# Altium PCB Space_OUT.PcbDoc (part 3 of 3)
Units mm, origin at the board's own origin, x right, y up, seen from the top; angles counter-clockwise.
Board outline 300 x 100 mm, 4 copper layers (Top Layer, MidLayer1, MidLayer2, Bottom Layer); 157 components, 49 nets, 745 pads, 302 vias.
Unrouted connection lines stored in the file: 3.
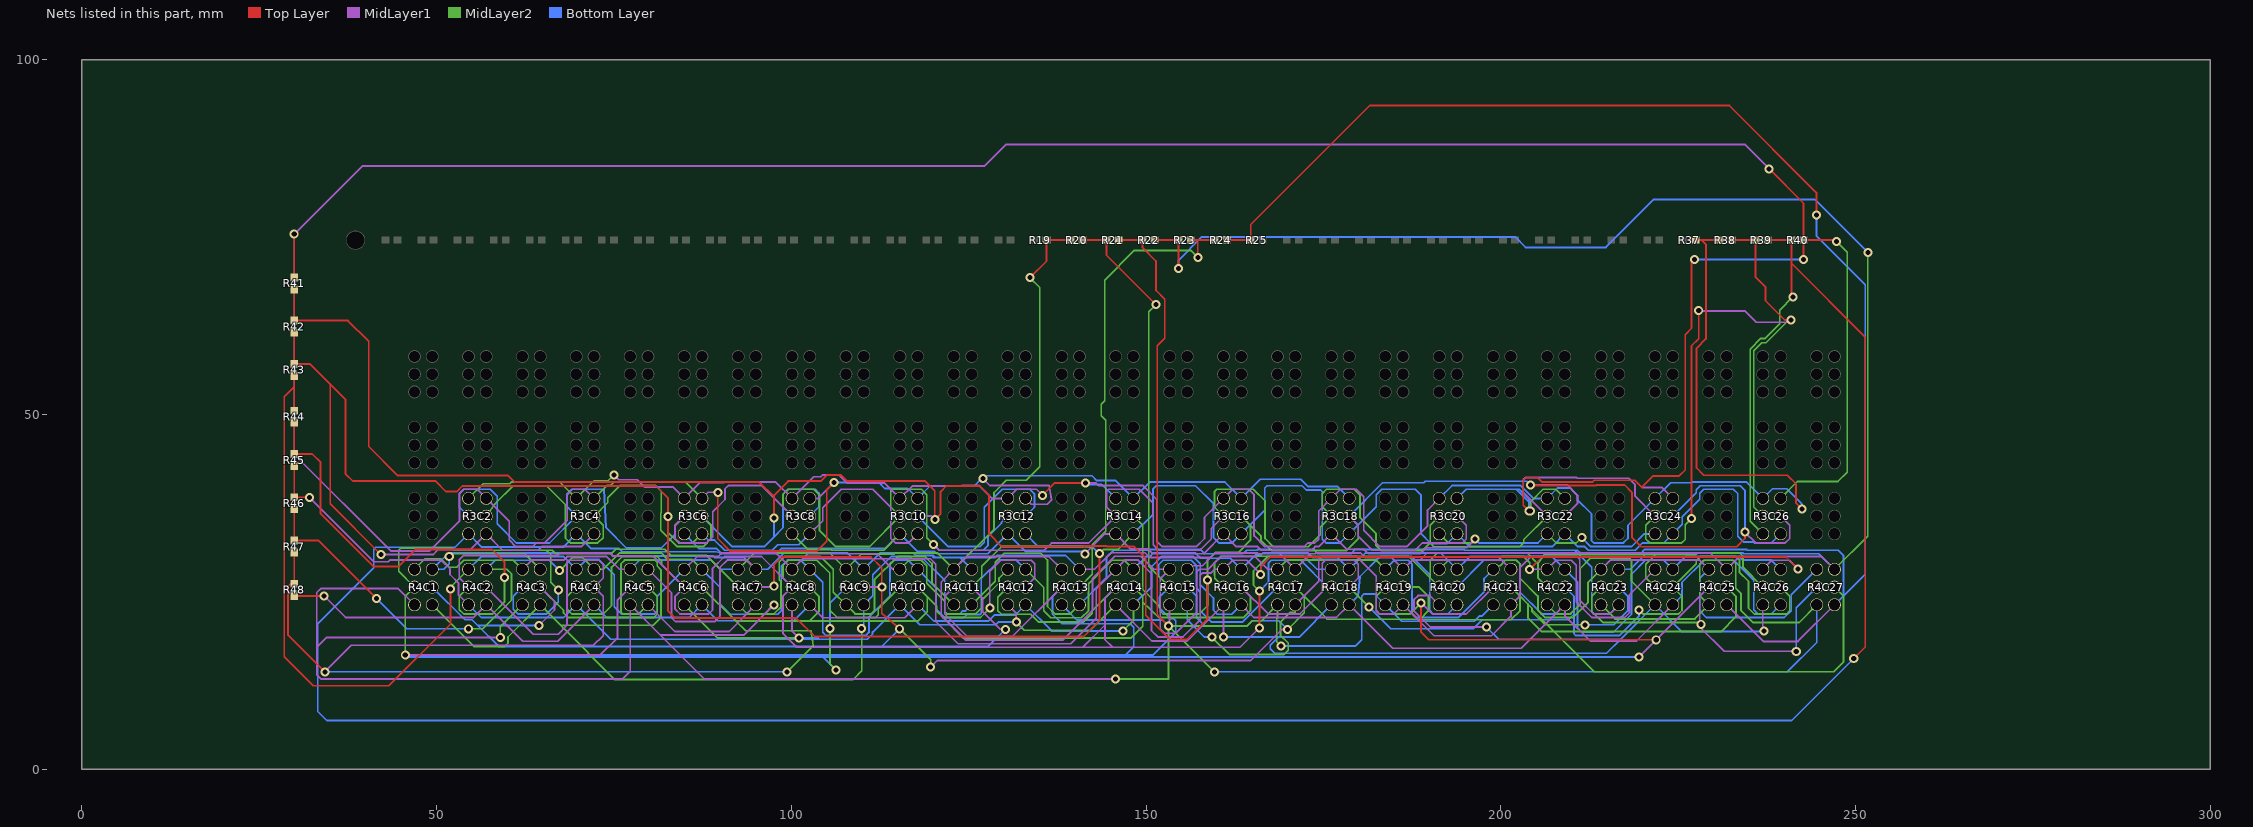
[diagram p5: the nets of this part, all layers, seen from the top]

## Via types
v1: diameter 1.27, hole 0.711, Top Layer to Bottom Layer, 302 vias

## Nets (pads, with @x,y where several pads share a name; then routed paths per layer and width w, separated by ;. In a path a pad name is that pad's centre, name@x,y a point inside that pad or via, vN(x,y) a via of type N, cw(c..) or ccw(c..) an arc to the next point about the centre after c; other vN are vias at no path point) (continued)
NetR3C2_1: R3C2.1 R3C4.1 R3C6.1 R3C8.1 R3C10.1 R3C12.1 R3C14.1 R3C16.1 R3C18.1 R3C20.1 R3C22.1 R3C24.1 R3C26.1 R37.1 R38.2 | length 311.9
  Top Layer w0.254: v1(135.42,38.595) 137.16,40.335 v1(141.503,40.335) ; R38.2@230.798,74.549 228.321,74.549 ; v1(242.418,36.678) 241.605,37.49 241.605,40.183 240.36,41.427 228.6,41.427 227.584,42.443 227.584,59.309 228.905,60.63 228.905,73.965 228.321,74.549 ; 228.321,74.549 R37.1@227.418,74.549 228.321,74.549
  MidLayer1 w0.254: v1(75.032,41.478) 75.729,40.781 78.308,40.781 79.312,39.776 83.309,39.776 R3C6.1@84.924,38.161 87.119,40.356 90.508,40.356 90.615,40.462 97.823,40.462 R3C8.1@100.124,38.161 103.171,41.208 104.184,41.208 104.413,41.438 106.755,41.438 107.879,40.313 113.172,40.313 R3C10.1@115.324,38.161 117.054,39.891 123.984,39.891 124.047,39.954 126.492,39.954 128.285,38.161 R3C12.1@130.524,38.161 131.809,39.446 134.569,39.446 v1(135.42,38.595) ; v1(141.503,40.335) 142.923,40.335 143.303,39.955 149.588,39.955 151.535,38.007 151.535,32.122 152.285,31.372 157.105,31.372 158.242,32.509 158.242,35.479 R3C16.1@160.924,38.161 162.209,39.446 164.475,39.446 165.238,38.683 165.238,32.869 166.735,31.372 172.308,31.372 172.813,31.877 173.793,31.877 174.346,32.429 174.346,36.383 R3C18.1@176.124,38.161 177.409,39.446 179.656,39.446 180.685,38.417 180.685,33.64 182.953,31.372 186.77,31.372 189.687,34.289 189.687,36.524 R3C20.1@191.324,38.161
  MidLayer2 w0.254: R3C2.1@54.524,38.161 56.588,40.225 60.326,40.225 60.559,40.458 67.427,40.458 R3C4.1@69.724,38.161 72.174,40.611 74.164,40.611 v1(75.032,41.478)
  Bottom Layer w0.254: v1(141.503,40.335) 141.72,40.118 143.767,40.118 R3C14.1@145.724,38.161 ; R3C20.1@191.324,38.161 193.117,39.954 202.794,39.954 204.587,38.161 R3C22.1@206.524,38.161 207.987,39.624 209.779,39.624 210.795,38.608 210.795,37.973 212.776,35.992 212.776,32.21 213.106,31.88 217.273,31.88 217.905,32.512 217.905,34.342 R3C24.1@221.724,38.161 223.919,40.356 226.927,40.356 227.029,40.458 234.627,40.458 R3C26.1@236.924,38.161 238.285,39.522 240.284,39.522 242.418,37.389 v1(242.418,36.678)
NetR3C2_2: R3C2.2 R3C4.2 R3C6.2 R3C8.2 R3C10.2 R3C12.2 R3C14.2 R3C16.2 R3C18.2 R3C20.2 R3C22.2 R3C24.2 R3C26.2 R38.1 R39.2 | length 417
  Top Layer w0.254: v1(226.873,35.331) 226.873,59.665 227.889,60.681 v1(227.889,64.618) ; R38.1@232.498,74.549 R39.2@235.878,74.549 235.878,69.379 237.287,67.97 237.287,66.04 240.03,63.297 v1(240.919,63.297)
  MidLayer1 w0.254: R3C6.2@84.924,35.661 83.642,34.379 83.642,32.512 84.274,31.88 88.065,31.88 88.951,32.766 88.951,36.271 90.678,37.998 90.678,39.51 91.123,39.954 95.831,39.954 R3C8.2@100.124,35.661 ; v1(120.04,31.674) 120.853,30.861 135.687,30.861 136.703,31.877 141.94,31.877 R3C14.2@145.724,35.661 144.424,36.961 144.424,39.141 144.73,39.447 149.057,39.447 151.027,37.477 151.027,31.614 151.777,30.864 157.613,30.864 159.182,32.433 159.182,33.919 R3C16.2@160.924,35.661 ; R3C22.2@206.524,35.661 203.175,39.01 203.175,40.839 203.444,41.108 210.653,41.108 210.765,40.996 218.008,40.996 218.921,40.083 218.921,38.464 R3C24.2@221.724,35.661 ; v1(227.889,64.618) 227.959,64.548 234.417,64.548 235.998,62.967 240.589,62.967 v1(240.919,63.297)
  MidLayer2 w0.254: R3C8.2@100.124,35.661 98.831,36.954 98.831,38.71 99.568,39.446 103.171,39.446 104.009,38.608 104.009,33.623 106.26,31.372 111.035,31.372 R3C10.2@115.324,35.661 114.043,36.942 114.043,39.185 114.3,39.442 118.364,39.442 119.105,38.701 119.105,32.609 v1(120.04,31.674) ; R3C16.2@160.924,35.661 159.639,36.946 159.639,39.116 159.969,39.446 165.126,39.446 166.776,37.796 166.776,32.512 167.945,31.344 172.869,31.344 174.549,33.024 174.549,34.086 R3C18.2@176.124,35.661 174.828,36.957 174.828,38.837 175.434,39.442 179.324,39.442 180.162,38.604 180.162,35.433 182.423,33.172 182.423,31.496 183.083,30.836 188.976,30.836 190.043,31.902 ; R3C20.2@191.324,35.661 190.043,34.38 ; R3C22.2@206.524,35.661 203.231,32.368 203.231,31.893 202.692,31.354 190.566,31.354 190.043,31.877 190.043,31.902 ; R3C24.2@221.724,35.661 220.421,34.358 220.421,32.439 220.98,31.88 225.501,31.88 225.984,32.363 225.984,34.442 v1(226.873,35.331) ; R3C26.2@236.924,35.661 235.643,36.942 235.643,58.968 236.775,60.1 237.364,60.1 240.561,63.297 v1(240.919,63.297) ; 190.043,31.902 190.043,34.38 ; 190.043,31.902 190.043,34.38
  Bottom Layer w0.254: R3C2.2@54.524,35.661 53.238,36.947 53.238,38.837 53.848,39.446 57.582,39.446 58.572,38.456 58.572,34.582 61.277,31.877 65.94,31.877 R3C4.2@69.724,35.661 68.428,36.957 68.428,38.786 69.088,39.446 73.635,39.446 73.914,34.011 76.759,31.166 81.686,31.166 83.642,33.122 83.642,34.379 R3C6.2@84.924,35.661 ; v1(120.04,31.674) 120.85,30.864 127.089,30.864 127.721,31.496 127.721,32.75 129.642,34.671 129.642,34.779 R3C12.2@130.524,35.661
NetR3C2_3: R3C2.3 R3C4.3 R3C6.3 R3C8.3 R3C10.3 R3C12.3 R3C14.3 R3C16.3 R3C18.3 R3C20.3 R3C22.3 R3C24.3 R3C26.3 R39.1 R40.2 | length 587.5
  Top Layer w0.254: R39.1@237.578,74.549 R40.2@240.958,74.549 ; v1(241.148,66.548) 240.958,66.738 240.958,71.284 ; v1(249.733,15.596) 251.358,17.221 251.358,60.884 240.958,71.284 ; 240.958,71.284 R40.2@240.958,74.549 ; 240.958,71.284 R40.2@240.958,74.549
  MidLayer1 w0.254: v1(141.402,30.353) 144.21,33.161 R3C14.3@145.724,33.161 147.872,31.013 150.292,31.013 150.949,30.356 158.119,30.356 R3C16.3@160.924,33.161 162.716,31.369 165.722,31.369 166.227,30.864 173.321,30.864 173.826,31.369 174.332,31.369 R3C18.3@176.124,33.161 178.282,31.003 180.712,31.003 181.359,30.356 188.66,30.356 189.519,31.215 195.197,31.215 v1(196.393,32.41)
  MidLayer2 w0.254: R3C8.3@100.124,33.161 102.319,30.966 105.636,30.966 105.738,30.864 113.027,30.864 R3C10.3@115.324,33.161 ; R3C20.3@191.324,33.161 192.605,31.88 195.862,31.88 v1(196.393,32.41) ; R3C22.3@206.524,33.161 207.808,31.877 210.642,31.877 v1(211.407,32.642) ; R3C26.3@236.924,33.161 235.135,34.95 235.135,59.191 236.65,60.706 237.236,60.706 239.293,62.763 239.293,64.694 v1(241.148,66.548)
  Bottom Layer w0.254: R3C6.3@84.924,33.161 87.008,31.077 89.506,31.077 90.227,30.356 ; v1(141.402,30.353) 141.097,30.658 133.027,30.658 R3C12.3@130.524,33.161 127.719,30.356 120.545,30.356 120.243,30.658 117.827,30.658 R3C10.3@115.324,33.161 113.278,31.115 98.648,31.115 97.889,30.356 90.227,30.356 ; v1(196.393,32.41) 196.923,31.88 205.243,31.88 R3C22.3@206.524,33.161 ; v1(211.407,32.642) 212.677,31.372 218.413,31.372 220.202,33.161 R3C24.3@221.724,33.161 ; v1(249.733,15.596) 240.995,6.858 34.544,6.858 33.274,8.128 33.274,20.498 41.173,28.397 41.173,30.988 41.453,31.267 52.63,31.267 R3C2.3@54.524,33.161 56.392,31.293 67.856,31.293 R3C4.3@69.724,33.161 71.77,31.115 75.71,31.115 76.189,30.636 89.439,30.636 90.227,30.356
NetR3C2_4: R3C2.4 R3C4.4 R3C6.4 R3C8.4 R3C10.4 R3C12.4 R3C14.4 R3C16.4 R3C18.4 R3C20.4 R3C22.4 R3C24.4 R3C26.4 R40.1 R41.2 | length 650
  Top Layer w0.254: R41.2@29.972,69.303 v1(29.972,75.387) ; v1(89.662,39.014) 89.662,32.512 91.44,30.734 103.632,30.734 105.004,32.106 105.004,39.37 v1(106.045,40.411) ; v1(203.962,36.398) 203.175,37.186 203.175,40.742 203.505,41.072 205.207,41.072 205.791,40.488 212.928,40.488 213.157,40.716 218.872,40.716 219.875,39.713 221.488,41.326 225.146,41.326 225.984,42.164 225.984,61.239 226.873,62.128 226.873,71.374 v1(227.305,71.806) ; v1(237.818,84.582) 242.658,79.742 R40.1@242.658,74.549 ; v1(242.658,71.806) R40.1@242.658,74.549 ; v1(247.294,74.371) 247.117,74.549 R40.1@242.658,74.549
  MidLayer1 w0.254: R3C4.4@72.224,38.161 70.939,39.446 69.19,39.446 68.443,38.7 68.443,35.05 65.273,31.88 64.095,31.88 63.587,31.372 61.197,31.372 60.267,32.302 60.267,34.918 R3C2.4@57.024,38.161 55.743,39.442 53.848,39.442 53.243,38.837 53.243,34.93 49.073,30.759 43.561,30.759 29.972,44.348 v1(29.972,75.387) 39.599,85.014 127.279,85.014 130.302,88.036 234.364,88.036 v1(237.818,84.582) ; R3C6.4@87.424,38.161 88.277,39.014 v1(89.662,39.014) ; R3C8.4@102.624,38.161 103.795,38.161 v1(106.045,40.411) ; v1(127,40.97) 128.016,39.954 136.373,39.954 136.703,37.95 136.091,37.338 133.847,37.338 R3C12.4@133.024,38.161 ; 222.736,39.649 222.672,39.713 219.875,39.713 219.939,39.649 222.736,39.649 ; 222.736,39.649 R3C24.4@224.224,38.161 222.736,39.649
  MidLayer2 w0.254: R3C4.4@72.224,38.161 74.017,39.954 74.524,39.954 75.032,40.462 85.123,40.462 R3C6.4@87.424,38.161 ; v1(204.191,36.398) 204.191,37.694 205.939,39.442 207.743,39.442 R3C22.4@209.024,38.161 ; R3C26.4@239.424,38.161 241.801,40.538 247.498,40.538 248.813,41.854 248.813,72.853 v1(247.294,74.371)
  Bottom Layer w0.254: v1(106.045,40.411) 112.319,40.411 113.182,39.548 116.437,39.548 R3C10.4@117.824,38.161 119.566,39.903 125.781,39.903 ; v1(127,40.97) v1@126.924,41.046 ; R3C18.4@178.624,38.161 176.937,39.848 172.813,39.848 171.818,40.843 166.106,40.843 R3C16.4@163.424,38.161 161.127,40.458 150.521,40.458 R3C14.4@148.224,38.161 145.72,40.665 143.073,40.665 142.387,41.351 127.229,41.351 v1@126.924,41.046 ; R3C20.4@193.824,38.161 195.109,39.446 ; v1(203.962,36.398) 203.962,37.668 ; v1(204.191,36.398) 204.191,37.44 203.962,37.668 ; v1(227.305,71.806) v1(242.658,71.806) ; 125.781,39.903 v1@126.924,41.046 ; 125.781,39.903 v1@126.924,41.046 ; 195.109,39.446 202.184,39.446 ; 195.109,39.446 202.184,39.446 ; 202.184,39.446 203.962,37.668 ; 202.184,39.446 202.583,39.446 203.962,38.067 203.962,37.668
NetR3C2_5: R3C2.5 R3C4.5 R3C6.5 R3C8.5 R3C10.5 R3C12.5 R3C14.5 R3C16.5 R3C18.5 R3C20.5 R3C22.5 R3C24.5 R3C26.5 R41.1 R42.2 | length 508.6
  Top Layer w0.254: R41.1@29.972,67.603 R42.2@29.972,63.207 37.529,63.207 40.462,60.274 40.462,45.466 44.552,41.377 60.122,41.377 61.036,40.462 95.504,40.462 97.587,38.379 ; v1(158.674,26.645) 158.674,21.184 155.778,18.288 153.34,18.288 149.962,21.666 149.962,29.743 148.336,31.369 144.526,31.369 144.45,31.445 141.275,31.445 141.199,31.369 129.667,31.369 127.889,33.147 127.889,38.608 126.594,39.903 121.844,39.903 121.056,39.116 121.056,35.966 v1(120.244,35.153) 120.244,39.218 118.872,40.589 107.905,40.589 107.057,41.438 105.025,41.438 104.176,40.589 99.568,40.589 97.587,38.608 97.587,38.379 ; v1(204.191,40.056) 204.267,39.98 213.436,39.98 213.512,40.056 217.424,40.056 218.465,39.014 218.465,32.69 219.812,31.344 233.223,31.344 234.391,32.512 v1(234.391,33.401) ; 97.587,38.379 v1(97.587,35.382) 97.587,38.379
  MidLayer1 w0.254: R3C10.5@117.824,35.661 119.736,35.661 v1(120.244,35.153) ; R3C18.5@178.624,35.661 179.908,34.377 179.908,32.823 181.867,30.864 187.912,30.864 188.925,31.877 194.564,31.877 195.123,32.436 195.123,34.362 R3C20.5@193.824,35.661 ; v1(204.191,40.056) 209.347,40.056 210.795,38.608 210.795,37.432 R3C22.5@209.024,35.661 ; v1(234.391,33.401) 235.912,31.88 240.073,31.88 240.705,32.512 240.705,34.38 R3C26.5@239.424,35.661
  MidLayer2 w0.254: R3C2.5@57.024,35.661 58.318,37.434 60.834,39.95 65.518,39.95 68.199,37.269 68.199,32.537 68.856,31.88 72.755,31.88 73.505,32.63 73.505,34.38 R3C4.5@72.224,35.661 74.143,37.58 74.143,38.227 75.87,39.954 80.899,39.954 81.686,39.166 81.686,36.17 81.61,36.093 81.61,33.699 83.937,31.372 87.582,31.372 88.722,32.512 88.722,34.363 R3C6.5@87.424,35.661 ; R3C14.5@148.224,35.661 149.53,34.355 149.53,25.324 152.019,22.835 152.019,22.25 152.4,21.869 157.48,21.869 158.674,23.063 v1(158.674,26.645) ; R3C16.5@163.424,35.661 164.719,34.366 ; R3C18.5@178.624,35.661 179.908,34.377 179.908,32.461 178.283,30.836 167.64,30.836 166.192,32.283 166.192,32.893 164.719,34.366 ; v1(158.674,26.645) 158.674,29.464 ; v1(158.674,26.645) 158.674,29.464 ; 158.674,29.464 159.791,30.582 163.043,30.582 164.719,32.258 164.719,34.366
  Bottom Layer w0.254: R3C6.5@87.424,35.661 91.713,31.372 96.181,31.372 ; v1(97.587,35.382) 97.587,32.778 ; R3C8.5@102.624,35.661 103.911,36.948 103.911,38.913 103.382,39.442 99.568,39.442 98.843,38.717 98.843,34.034 97.587,32.778 ; R3C10.5@117.824,35.661 122.113,31.372 126.581,31.372 127.213,32.004 127.213,36.891 129.764,39.442 133.604,39.442 134.305,38.741 134.305,36.942 R3C12.5@133.024,35.661 ; R3C18.5@178.624,35.661 183.324,40.361 189.128,40.361 189.332,40.564 203.683,40.564 v1(204.191,40.056) ; R3C24.5@224.224,35.661 227.535,38.972 227.535,39.393 228.092,39.95 233.718,39.95 234.391,39.277 v1(234.391,33.401) ; 96.181,31.372 97.587,32.778 ; 96.181,31.372 97.587,32.778
NetR3C2_6: R3C2.6 R3C4.6 R3C6.6 R3C8.6 R3C10.6 R3C12.6 R3C14.6 R3C16.6 R3C18.6 R3C20.6 R3C22.6 R3C24.6 R3C26.6 R42.1 R43.2 | length 445.5
  Top Layer w0.254: R42.1@29.972,61.507 R43.2@29.972,57.111 32.182,57.111 ; v1(42.189,30.251) 35.052,37.389 35.052,54.241 ; v1(143.434,30.378) 143.434,20.904 141.224,18.694 103.327,18.694 100.736,21.285 83.693,21.285 82.626,22.352 ; 32.182,57.111 35.052,54.241 ; 32.182,57.111 35.052,54.241 ; 35.052,54.241 37.186,52.107 37.186,41.656 38.252,40.589 49.886,40.589 51.359,39.116 52.883,39.116 53.67,39.903 80.95,39.903 82.626,38.227 v1(82.626,35.585) ; 82.626,22.352 v1(82.626,35.585) ; 82.626,22.352 v1(82.626,35.585)
  MidLayer1 w0.254: v1(42.189,30.251) 49.581,30.251 50.292,30.963 54.826,30.963 R3C2.6@57.024,33.161 59.321,30.864 64.37,30.864 64.878,31.372 70.435,31.372 R3C4.6@72.224,33.161 ; R3C8.6@102.624,33.161 104.438,34.975 104.438,36.823 107.057,39.442 111.506,39.442 114.043,36.905 114.043,32.512 114.675,31.88 116.543,31.88 R3C10.6@117.824,33.161
  MidLayer2 w0.254: v1(82.626,35.585) 82.626,33.401 84.147,31.88 86.143,31.88 R3C6.6@87.424,33.161 ; v1(143.434,30.378) 143.993,30.937 146,30.937 R3C14.6@148.224,33.161
  Bottom Layer w0.254: R3C6.6@87.424,33.161 88.287,32.298 89.187,32.298 90.621,30.864 97.327,30.864 98.086,31.623 101.086,31.623 R3C8.6@102.624,33.161 ; R3C12.6@133.024,33.161 134.816,31.369 142.443,31.369 v1(143.434,30.378) ; R3C14.6@148.224,33.161 150.999,35.936 150.999,39.495 151.455,39.95 156.972,39.95 159.522,37.4 159.522,32.616 160.258,31.88 162.143,31.88 R3C16.6@163.424,33.161 166.735,36.472 166.735,39.624 167.061,39.95 171.979,39.95 172.589,39.34 174.619,39.34 174.843,39.116 174.843,32.399 175.362,31.88 177.343,31.88 R3C18.6@178.624,33.161 182.443,36.98 182.443,38.692 183.193,39.442 187.96,39.442 188.773,38.629 188.773,33.172 190.144,31.801 192.464,31.801 R3C20.6@193.824,33.161 195.613,31.372 207.235,31.372 R3C22.6@209.024,33.161 210.813,31.372 211.827,31.372 212.335,30.864 218.921,30.864 219.934,31.877 222.94,31.877 R3C24.6@224.224,33.161 225.577,34.514 225.577,35.56 228.043,38.026 228.043,38.885 228.6,39.442 232.779,39.442 233.375,38.846 233.375,32.842 234.188,32.029 235.588,32.029 235.737,31.88 238.143,31.88 R3C26.6@239.424,33.161
NetR4C1_1: R4C1.1 R4C3.1 R4C5.1 R4C7.1 R4C9.1 R4C11.1 R4C13.1 R4C15.1 R4C17.1 R4C19.1 R4C21.1 R4C23.1 R4C25.1 R4C27.1 R19.1 R20.1 | length 355.7
  Top Layer w0.254: v1(133.641,69.266) 135.978,71.603 R19.1@135.978,74.549 R20.1@139.358,74.549
  MidLayer1 w0.254: R4C3.1@62.124,28.161 63.427,29.464 67.935,29.464 68.421,29.95 74.013,29.95 75.802,28.161 R4C5.1@77.324,28.161 ; R4C13.1@138.124,28.161 136.335,29.95 124.713,29.95 R4C11.1@122.924,28.161 121.135,26.372 121.135,21.649 124.598,18.186 138.278,18.186 142.443,22.352 142.443,26.845 145.596,29.997 149.276,29.997 151.112,28.161 R4C15.1@153.324,28.161 152.019,26.856 152.019,19.71 152.578,19.152 154.203,19.152 157.15,22.098 157.15,27.838 157.48,28.169 158.747,28.169 160.528,29.95 165.379,29.95 167.168,28.161 R4C17.1@168.524,28.161 ; R4C23.1@214.124,28.161 215.427,29.464 228.021,29.464 R4C25.1@229.324,28.161
  MidLayer2 w0.254: R4C1.1@46.924,28.161 48.405,29.642 50.597,29.642 51.791,28.448 52.857,28.448 53.851,29.442 60.843,29.442 R4C3.1@62.124,28.161 ; R4C7.1@92.524,28.161 94.821,30.458 105.427,30.458 R4C9.1@107.724,28.161 109.891,30.328 114.478,30.328 114.63,30.48 120.605,30.48 R4C11.1@122.924,28.161 128.6,33.837 128.6,38.989 130.327,40.716 133.096,40.716 135.026,42.647 135.026,67.881 v1(133.641,69.266) ; R4C17.1@168.524,28.161 169.827,29.464 182.421,29.464 R4C19.1@183.724,28.161 ; R4C21.1@198.924,28.161 198.924,28.677 199.895,28.677 200.66,29.442 202.184,29.442 202.705,28.921 202.705,26.924 205.232,24.397 205.232,22.377 206.248,21.361 210.16,21.361 212.293,23.495 212.293,26.33 R4C23.1@214.124,28.161
  Bottom Layer w0.254: R4C5.1@77.324,28.161 78.627,29.464 88.703,29.464 90.006,28.161 R4C7.1@92.524,28.161 ; R4C19.1@183.724,28.161 185.005,29.442 186.944,29.442 187.505,28.881 187.505,21.918 188.062,21.361 194.005,21.361 197.637,24.994 197.637,26.874 R4C21.1@198.924,28.161 ; R4C25.1@229.324,28.161 228.041,26.878 228.041,22.301 228.97,21.372 239.939,21.372 240.919,22.352 240.919,24.556 R4C27.1@244.524,28.161
NetR4C1_2: R4C1.2 R4C3.2 R4C5.2 R4C7.2 R4C9.2 R4C11.2 R4C13.2 R4C15.2 R4C17.2 R4C19.2 R4C21.2 R4C23.2 R4C25.2 R4C27.2 R20.2 R21.2 | length 869.1
  Top Layer w0.254: R20.2@141.058,74.549 R21.2@144.438,74.549 144.438,72.427 v1(151.409,65.456) ; v1(188.773,23.444) 188.773,19.304 189.84,18.237 v1(221.9,18.237)
  MidLayer1 w0.254: v1(45.618,16.104) 73.101,16.104 75.54,18.542 75.54,23.877 R4C5.2@77.324,25.661 ; R4C11.2@122.924,25.661 121.643,24.38 121.643,21.869 124.818,18.694 131.157,18.694 R4C13.2@138.124,25.661 ; v1(188.773,23.444) 190.348,21.869 195.132,21.869 R4C21.2@198.924,25.661 ; v1(219.462,15.799) v1(221.9,18.237) 228.041,24.378 ; v1(228.194,20.422) v1@228.041,20.574 ; v1(241.63,16.612) 231.47,16.612 228.041,20.041 228.041,20.422 v1@228.041,20.574 ; v1@228.041,20.574 228.041,24.378 ; v1@228.041,20.574 228.041,24.378 ; 228.041,24.378 R4C25.2@229.324,25.661 228.041,24.378
  MidLayer2 w0.254: v1(45.618,16.104) 45.618,24.355 R4C1.2@46.924,25.661 44.704,27.881 44.704,30.878 44.992,31.166 52.192,31.166 52.497,30.861 ; v1(67.183,25.273) 66.116,26.34 66.116,30.251 65.507,30.861 ; R4C7.2@92.524,25.661 88.035,30.15 83.022,30.15 82.185,30.988 75.271,30.988 74.639,30.356 66.843,30.356 66.338,30.861 65.507,30.861 ; v1(105.461,19.837) 105.461,14.834 v1(106.324,13.97) ; v1(151.409,65.456) 150.393,64.44 150.393,28.592 R4C15.2@153.324,25.661 ; R4C19.2@183.724,25.661 182.443,24.38 182.443,22.317 182.88,21.88 187.209,21.88 v1(188.773,23.444) ; R4C23.2@214.124,25.661 212.827,24.364 212.827,22.225 214.376,20.676 227.94,20.676 v1(228.194,20.422) ; 52.497,30.861 65.507,30.861 ; 52.497,30.861 65.507,30.861
  Bottom Layer w0.254: R4C3.2@62.124,25.661 60.833,24.37 60.833,22.515 61.468,21.88 65.532,21.88 67.183,23.531 v1(67.183,25.273) ; v1(105.461,19.837) 105.461,23.398 R4C9.2@107.724,25.661 ; v1(106.324,13.97) 104.496,15.799 ; R4C13.2@138.124,25.661 136.83,24.367 136.83,21.844 138.176,20.498 147.777,20.498 148.285,19.99 148.285,17.272 147.117,16.104 ; R4C17.2@168.524,25.661 163.589,20.726 159.283,20.726 157.658,22.352 157.658,24.95 157.124,25.483 157.124,28.672 156.355,29.442 152.4,29.442 151.765,28.807 151.765,27.22 R4C15.2@153.324,25.661 151.892,24.229 151.892,22.775 153.458,21.209 153.924,21.209 154.203,20.93 154.203,19.304 151.003,16.104 147.117,16.104 ; v1(219.462,15.799) 104.496,15.799 ; v1(241.63,16.612) 241.63,22.767 R4C27.2@244.524,25.661 ; v1(45.618,16.104) 104.191,16.104 ; v1(45.618,16.104) 104.191,16.104 ; v1(45.618,16.104) 45.923,15.799 104.496,15.799 ; v1(45.618,16.104) 104.191,16.104 ; 104.191,16.104 147.117,16.104 ; 104.191,16.104 147.117,16.104 ; 104.191,16.104 104.496,15.799
NetR4C1_3: R4C1.3 R4C3.3 R4C5.3 R4C7.3 R4C9.3 R4C11.3 R4C13.3 R4C15.3 R4C17.3 R4C19.3 R4C21.3 R4C23.3 R4C25.3 R4C27.3 R21.1 R22.1 | length 576.7
  Top Layer w0.254: R21.1@146.138,74.549 R22.1@149.518,74.549 149.518,73.494 151.409,71.603 151.409,67.462 152.629,66.243 152.629,60.706 151.587,59.665 151.587,21.768 v1(153.187,20.168)
  MidLayer1 w0.254: R4C1.3@46.924,23.161 44.634,25.451 33.706,25.451 33.147,24.892 33.147,17.17 ; v1(59.004,18.567) 34.544,18.567 33.147,17.17 ; v1(97.561,23.165) 93.294,18.898 81.587,18.898 ; v1(145.72,12.7) 87.785,12.7 81.587,18.898 ; v1(153.187,20.168) 153.324,20.304 R4C15.3@153.324,23.161 ; 33.147,13.335 33.147,17.17 ; 33.147,13.335 33.782,12.7 76.2,12.7 77.324,13.824 R4C5.3@77.324,23.161 ; 33.147,13.335 33.147,17.17 ; R4C5.3@77.324,23.161 81.587,18.898 ; R4C5.3@77.324,23.161 81.587,18.898
  MidLayer2 w0.254: v1(59.004,18.567) 59.004,20.041 R4C3.3@62.124,23.161 ; R4C7.3@92.524,23.161 93.816,21.869 ; v1(97.561,23.165) 96.266,21.869 ; R4C11.3@122.924,23.161 119.837,26.248 119.837,28.985 118.872,29.95 115.015,29.95 111.735,26.67 111.735,22.337 111.277,21.88 109.005,21.88 R4C9.3@107.724,23.161 105.935,24.95 105.935,28.155 104.14,29.95 99.06,29.95 98.323,29.213 98.323,26.695 98.577,26.441 98.577,22.911 97.536,21.869 96.266,21.869 ; v1(145.72,12.7) 153.187,12.7 v1(153.187,20.168) ; v1(159.639,13.716) v1(153.187,20.168) ; v1(169.032,17.348) 168.427,17.953 168.427,21.209 168.524,21.306 R4C17.3@168.524,23.161 166.293,20.93 164.973,20.93 164.211,20.168 v1(153.187,20.168) ; R4C23.3@214.124,23.161 216.101,21.184 227.347,21.184 R4C25.3@229.324,23.161 228.043,24.442 228.043,28.885 228.6,29.442 232.664,29.442 233.105,29.001 233.105,25.476 233.858,24.723 233.858,22.352 235.56,20.65 242.013,20.65 R4C27.3@244.524,23.161 ; 93.816,21.869 96.266,21.869 ; 93.816,21.869 96.266,21.869
  Bottom Layer w0.254: R4C13.3@138.124,23.161 140.267,21.018 152.337,21.018 v1(153.187,20.168) ; v1(159.639,13.716) 240.386,13.716 244.524,17.854 R4C27.3@244.524,23.161 ; v1(169.032,17.348) 179.495,17.348 180.391,18.244 180.391,24.384 180.696,24.689 182.196,24.689 R4C19.3@183.724,23.161 186.032,20.853 196.267,20.853 196.979,21.565 197.328,21.565 R4C21.3@198.924,23.161
NetR4C1_4: R4C1.4 R4C3.4 R4C5.4 R4C7.4 R4C9.4 R4C11.4 R4C13.4 R4C15.4 R4C17.4 R4C19.4 R4C21.4 R4C23.4 R4C25.4 R4C27.4 R22.2 R23.2 | length 482.4
  Top Layer w0.254: R22.2@151.218,74.549 R23.2@154.598,74.549 v1(154.598,70.561)
  MidLayer1 w0.254: R4C5.4@79.824,28.161 83.135,24.85 83.135,21.361 83.7,20.795 89.213,20.795 89.967,21.549 89.967,28.448 90.983,29.464 93.721,29.464 R4C7.4@95.024,28.161 ; R4C13.4@140.624,28.161 142.743,28.161 145.088,30.505 149.86,30.505 150.517,29.848 159.137,29.848 ; R4C15.4@155.824,28.161 156.34,28.677 157.966,28.677 159.137,29.848 ; R4C21.4@201.424,28.161 200.121,29.464 188.608,29.464 ; R4C27.4@247.024,28.161 245.235,29.95 233.613,29.95 R4C25.4@231.824,28.161 229.527,30.458 189.602,30.458 188.608,29.464 ; 159.137,29.848 159.747,30.458 ; 159.137,29.848 159.747,30.458 ; 159.747,30.458 165.719,30.458 165.821,30.356 ; 165.821,30.356 168.829,30.356 ; 165.821,30.356 168.829,30.356 ; 168.829,30.356 173.219,30.356 ; 168.829,30.356 R4C17.4@171.024,28.161 173.219,30.356 ; 173.219,30.356 173.829,30.356 ; 173.219,30.356 173.829,30.356 ; 173.829,30.356 173.931,30.458 180.272,30.458 180.882,29.848 184.537,29.848 R4C19.4@186.224,28.161 187.527,29.464 ; 187.527,29.464 188.608,29.464 ; 187.527,29.464 188.608,29.464
  MidLayer2 w0.254: v1(51.816,29.947) 52.222,30.353 62.432,30.353 R4C3.4@64.624,28.161 ; R4C27.4@247.024,28.161 251.714,32.851 v1(251.714,72.822)
  Bottom Layer w0.254: v1(51.816,29.947) 51.816,28.931 51.046,28.161 R4C1.4@49.424,28.161 51.513,30.25 51.721,30.458 51.816,30.458 74.417,30.458 74.838,30.037 89.022,30.037 89.211,29.848 93.337,29.848 R4C7.4@95.024,28.161 96.71,28.161 99.029,30.48 107.905,30.48 R4C9.4@110.224,28.161 112.543,30.48 117.172,30.48 117.537,30.115 ; R4C11.4@125.424,28.161 123.737,29.848 ; R4C13.4@140.624,28.161 138.67,30.115 129.004,30.115 128.737,29.848 123.737,29.848 ; v1(154.598,70.561) 154.598,71.72 157.884,75.006 202.006,75.006 203.479,73.533 214.808,73.533 221.564,80.289 244.246,80.289 v1(251.714,72.822) ; R4C23.4@216.624,28.161 218.25,28.161 220.547,30.458 234.12,30.458 234.222,30.356 244.829,30.356 R4C27.4@247.024,28.161 ; 117.537,30.115 119.769,30.115 ; 117.537,30.115 119.769,30.115 ; 119.769,30.115 120.037,30.115 120.304,29.848 ; 119.769,30.115 120.037,29.848 120.304,29.848 ; 120.304,29.848 123.737,29.848
NetR4C1_5: R4C1.5 R4C3.5 R4C5.5 R4C7.5 R4C9.5 R4C11.5 R4C13.5 R4C15.5 R4C17.5 R4C19.5 R4C21.5 R4C23.5 R4C25.5 R4C27.5 R23.1 R24.1 | length 585.5
  Top Layer w0.254: v1(97.561,25.781) 97.561,28.778 98.679,29.896 111.252,29.896 112.776,28.372 v1(112.776,25.661) 112.776,21.996 v1(115.291,19.787) ; v1(157.302,72.085) 157.302,74.219 156.972,74.549 ; R24.1@159.678,74.549 156.972,74.549 ; 156.972,74.549 R23.1@156.298,74.549 156.972,74.549
  MidLayer1 w0.254: v1(64.465,20.244) 66.65,22.428 66.65,23.635 R4C3.5@64.624,25.661 ; R4C7.5@95.024,25.661 97.441,25.661 v1(97.561,25.781) ; R4C9.5@110.224,25.661 v1(112.776,25.661) ; v1(119.659,14.402) 120.574,15.316 164.744,15.316 169.113,19.685 v1(169.951,19.685) ; R4C11.5@125.424,25.661 126.975,24.11 126.975,22.2 129.464,19.71 v1(130.2,19.71)
  MidLayer2 w0.254: R4C3.5@64.624,25.661 67.917,22.368 67.917,22.025 68.58,21.361 80.62,21.361 81.128,21.869 81.128,24.357 R4C5.5@79.824,25.661 ; v1(115.291,19.787) 119.659,15.418 v1(119.659,14.402) ; R4C11.5@125.424,25.661 126.848,27.085 126.848,28.575 129.642,31.369 142.037,31.369 142.418,30.988 ; R4C13.5@140.624,25.661 142.418,27.455 ; v1(157.302,72.085) 156.286,73.101 148.374,73.101 144.2,68.928 144.2,51.943 143.692,51.435 143.692,49.784 144.323,49.153 144.323,33.531 142.418,31.626 142.418,30.988 ; v1(169.951,19.685) 172.314,22.047 172.314,24.371 ; R4C19.5@186.224,25.661 188.512,25.661 189.789,24.384 189.789,22.352 188.64,21.109 ; v1(211.836,20.345) 206.546,20.345 ; R4C25.5@231.824,25.661 233.121,24.364 233.121,21.463 231.046,19.387 207.503,19.387 ; R4C27.5@247.024,25.661 248.31,24.375 248.31,15.138 246.888,13.716 213.175,13.716 207.503,19.387 ; 142.418,27.455 142.418,30.988 ; 142.418,27.455 142.418,30.988 ; 172.314,24.371 R4C17.5@171.024,25.661 172.314,24.371 ; 172.314,24.371 175.527,21.158 ; 175.527,21.158 188.64,21.109 ; 175.527,21.158 188.595,21.06 188.64,21.109 ; 188.64,21.109 201.426,21.06 202.717,22.352 202.717,24.368 ; R4C21.5@201.424,25.661 202.717,24.368 ; R4C21.5@201.424,25.661 202.717,24.368 ; R4C21.5@201.424,25.661 202.717,24.368 ; 202.717,24.368 203.81,23.275 ; 202.717,24.368 203.81,23.275 ; 203.81,23.275 204.394,22.691 ; 203.81,23.275 203.81,21.336 205.758,19.387 207.503,19.387 ; 204.394,22.497 204.394,22.691 ; 204.394,22.497 204.394,22.2 206.248,20.345 206.546,20.345 ; 204.394,22.497 206.546,20.345 ; 204.394,22.497 204.394,22.691 ; 206.546,20.345 207.503,19.387
  Bottom Layer w0.254: R4C1.5@49.424,25.661 54.041,21.044 55.026,21.044 ; v1(64.465,20.244) 55.826,20.244 ; v1(115.291,19.787) 112.801,17.297 ; v1(130.2,19.71) 127.787,17.297 112.801,17.297 ; R4C15.5@155.824,25.661 157.124,24.361 157.124,21.336 158.318,20.142 164.186,20.142 164.973,20.93 168.707,20.93 v1(169.951,19.685) ; v1(211.836,20.345) 215.898,20.345 217.905,22.352 217.905,24.38 R4C23.5@216.624,25.661 ; 55.026,21.044 55.826,20.244 ; 55.026,21.044 55.826,20.244 ; 55.826,20.244 58.773,17.297 ; 58.773,17.297 112.801,17.297 ; 58.773,17.297 112.801,17.297
NetR4C1_6: R4C1.6 R4C3.6 R4C5.6 R4C7.6 R4C9.6 R4C11.6 R4C13.6 R4C15.6 R4C17.6 R4C19.6 R4C21.6 R4C23.6 R4C25.6 R4C27.6 R24.2 R25.2 | length 627.6
  Top Layer w0.254: R24.2@161.378,74.549 R25.2@164.758,74.549 164.758,76.759 181.522,93.523 232.207,93.523 244.475,81.255 v1(244.475,78.105)
  MidLayer1 w0.254: R4C5.6@79.824,23.161 83.579,19.406 91.269,19.406 R4C7.6@95.024,23.161 ; R4C17.6@171.024,23.161 174.335,26.472 174.335,29.533 174.752,29.95 179.702,29.95 182.443,27.209 182.443,22.306 182.88,21.869 184.932,21.869 R4C19.6@186.224,23.161 190.585,18.8 198.689,18.8 201.424,21.535 R4C21.6@201.424,23.161 202.717,24.454 202.717,28.448 204.219,29.95 210.749,29.95 211.133,29.566 211.133,23.792 213.055,21.869 215.332,21.869 R4C23.6@216.624,23.161 ; R4C25.6@231.824,23.161 236.976,18.009 241.872,18.009 R4C27.6@247.024,23.161
  MidLayer2 w0.254: R4C1.6@49.424,23.161 55.313,17.272 59.585,17.272 60.093,17.78 60.093,18.63 R4C3.6@64.624,23.161 ; R4C5.6@79.824,23.161 78.543,21.88 76.266,21.88 76.022,22.123 76.022,28.956 76.53,29.464 80.841,29.464 81.125,29.179 81.125,28.626 81.636,28.116 81.636,21.336 80.569,20.269 67.516,20.269 ; v1(109.931,19.837) 109.931,13.843 108.712,12.624 75.161,12.624 67.516,20.269 ; R4C11.6@125.424,23.161 128.753,26.49 128.753,29.134 130.048,30.429 135.153,30.429 136.119,29.464 136.119,22.921 137.16,21.88 139.343,21.88 R4C13.6@140.624,23.161 ; v1(159.283,18.618) 161.722,16.18 169.469,16.18 170.053,16.764 170.053,17.78 168.935,18.898 168.935,20.701 170.332,22.098 171.024,22.098 R4C17.6@171.024,23.161 ; R4C3.6@64.624,23.161 67.516,20.269 ; R4C3.6@64.624,23.161 67.516,20.269
  Bottom Layer w0.254: v1(109.931,19.837) 110.224,20.13 R4C9.6@110.224,23.161 111.506,24.443 111.506,27.381 114.097,29.972 116.789,29.972 117.17,29.591 118.643,29.591 121.641,26.594 121.641,22.159 121.92,21.88 123.785,21.88 124.206,22.301 124.564,22.301 R4C11.6@125.424,23.161 ; R4C13.6@140.624,23.161 144.424,26.961 144.424,29.852 145.436,30.864 150.417,30.864 150.519,30.966 157.665,30.966 158.275,30.356 163.667,30.356 164.175,30.864 165.617,30.864 165.719,30.966 173.622,30.966 174.232,30.356 178.903,30.356 179.513,30.966 194.789,30.966 194.891,30.864 ; R4C15.6@155.824,23.161 155.824,21.036 158.242,18.618 v1(159.283,18.618) ; R4C23.6@216.624,23.161 215.332,21.869 213.106,21.869 212.827,22.149 212.827,28.459 210.421,30.864 ; v1(244.475,78.105) 244.475,75.159 251.358,68.275 251.358,27.495 248.31,24.447 ; 194.891,30.864 210.421,30.864 ; 194.891,30.864 210.421,30.864 ; 210.421,30.864 210.811,30.864 211.319,30.356 219.696,30.356 220.306,30.966 234.628,30.966 234.73,30.864 247.52,30.864 248.31,30.074 248.31,24.447 ; 248.31,24.447 R4C27.6@247.024,23.161 248.31,24.447
NetR4C2_1: R4C2.1 R4C4.1 R4C6.1 R4C8.1 R4C10.1 R4C12.1 R4C14.1 R4C16.1 R4C18.1 R4C20.1 R4C22.1 R4C24.1 R4C26.1 R43.1 R44.2 | length 462.6
  Top Layer w0.254: R44.2@29.972,50.507 29.972,53.899 ; v1(51.994,25.375) 51.994,20.447 43.307,11.76 32.639,11.76 28.575,15.824 28.575,52.502 29.972,53.899 ; v1(166.167,27.457) 166.167,28.524 167.538,29.896 205.806,29.896 ; v1(204.071,28.161) 205.806,29.896 ; v1(241.884,28.194) 240.182,29.896 ; 29.972,53.899 R43.1@29.972,55.411 29.972,53.899 ; 205.806,29.896 240.182,29.896 ; 205.806,29.896 240.182,29.896
  MidLayer1 w0.254: R4C6.1@84.924,28.161 86.735,29.972 89.707,29.972 90.215,30.48 97.805,30.48 R4C8.1@100.124,28.161 ; R4C10.1@115.324,28.161 114.285,28.161 112.804,29.642 ; v1(166.167,27.457) 164.182,29.442 162.205,29.442 R4C16.1@160.924,28.161 159.69,28.161 159.189,27.661 157.988,27.661 157.658,27.33 157.658,21.082 155.219,18.644 151.663,18.644 150.774,19.533 150.774,27.559 148.844,29.489 147.052,29.489 R4C14.1@145.724,28.161 142.995,25.432 142.995,21.278 139.395,17.678 123.505,17.678 120.371,20.813 120.371,28.905 119.634,29.642 112.804,29.642 ; v1(204.071,28.161) R4C22.1@206.524,28.161 207.805,29.442 209.928,29.442 210.617,28.753 210.617,23.589 212.845,21.361 217.424,21.361 218.132,22.069 218.132,24.569 R4C24.1@221.724,28.161 ; R4C26.1@236.924,28.161 238.205,29.442 240.636,29.442 v1(241.884,28.194) ; R4C8.1@100.124,28.161 101.605,29.642 ; R4C8.1@100.124,28.161 101.605,29.642 ; 101.605,29.642 112.804,29.642 ; 101.605,29.642 102.319,30.356 112.09,30.356 112.804,29.642
  MidLayer2 w0.254: v1(51.994,25.375) 51.994,25.631 R4C2.1@54.524,28.161 ; R4C10.1@115.324,28.161 116.605,29.442 118.355,29.442 119.105,28.692 119.105,26.192 121.643,23.654 121.643,22.157 121.92,21.88 125.984,21.88 126.848,22.744 126.848,23.8 129.286,26.238 129.286,26.923 R4C12.1@130.524,28.161 ; R4C20.1@191.324,28.161 192.627,29.464 199.635,29.464 200.121,29.95 203.213,29.95 204.071,29.092 v1(204.071,28.161)
  Bottom Layer w0.254: R4C2.1@54.524,28.161 56.313,29.95 67.935,29.95 R4C4.1@69.724,28.161 71.103,29.54 72.923,29.54 75.057,27.407 75.057,22.871 76.048,21.88 80.772,21.88 81.128,22.236 81.128,24.365 R4C6.1@84.924,28.161 ; v1(166.167,27.457) 166.167,28.985 167.132,29.95 172.305,29.95 174.094,28.161 R4C18.1@176.124,28.161
NetR4C2_2: R4C2.2 R4C4.2 R4C6.2 R4C8.2 R4C10.2 R4C12.2 R4C14.2 R4C16.2 R4C18.2 R4C20.2 R4C22.2 R4C24.2 R4C26.2 R44.1 R45.2 | length 519.5
  Top Layer w0.254: R44.1@29.972,48.807 R45.2@29.972,44.411 32.512,44.411 33.68,43.243 33.68,36.017 41.123,28.575 44.704,28.575 47.092,30.963 57.836,30.963 59.588,29.21 v1(59.588,27.026) ; v1(165.989,19.914) v1(165.989,25.095)
  MidLayer1 w0.254: R4C2.2@54.524,25.661 53.238,26.947 53.238,29.515 53.848,30.124 67.093,30.124 67.427,30.458 74.521,30.458 74.951,30.028 80.557,30.028 R4C6.2@84.924,25.661 83.643,24.38 83.643,22.554 84.328,21.869 88.367,21.869 88.925,22.428 88.925,28.296 90.602,29.972 95.813,29.972 R4C8.2@100.124,25.661 98.831,24.368 98.831,19.126 100.787,17.17 ; R4C14.2@145.724,25.661 144.221,24.158 ; v1(165.989,19.914) 163.246,17.17 ; 100.787,17.17 141.072,17.17 ; 100.787,17.17 141.072,17.17 ; 141.072,17.17 144.221,20.32 ; 141.072,17.17 145.288,17.17 ; 144.221,20.32 144.221,24.158 ; 144.221,20.32 144.221,18.237 145.288,17.17 ; 144.221,20.32 144.221,24.158 ; 145.288,17.17 163.246,17.17 ; 145.288,17.17 163.246,17.17
  MidLayer2 w0.254: R4C2.2@54.524,25.661 53.238,24.375 53.238,22.479 53.848,21.869 57.912,21.869 59.588,23.546 v1(59.588,27.026) ; R4C4.2@69.724,25.661 68.428,24.365 68.428,22.53 69.088,21.869 73.508,21.869 74.701,23.063 74.701,28.473 76.2,29.972 81.153,29.972 81.725,29.4 81.725,28.86 R4C6.2@84.924,25.661 ; R4C8.2@100.124,25.661 98.843,26.942 98.843,28.717 99.568,29.442 103.632,29.442 105.427,27.647 105.427,22.419 106.474,21.372 111.899,21.372 112.267,21.74 112.267,22.604 R4C10.2@115.324,25.661 ; R4C12.2@130.524,25.661 129.108,24.245 129.108,22.352 129.642,21.819 133.756,21.819 134.823,20.752 141.224,20.752 142.418,21.946 142.418,22.355 R4C14.2@145.724,25.661 ; R4C16.2@160.924,25.661 159.69,26.895 159.639,27.661 159.639,29.058 160.579,29.997 167.208,29.997 ; v1(165.989,25.095) 165.151,25.933 165.151,27.94 167.208,29.997 ; R4C22.2@206.524,25.661 205.232,26.953 205.232,28.947 ; R4C24.2@221.724,25.661 220.421,26.964 220.421,28.854 221.793,30.226 ; R4C26.2@236.924,25.661 234.137,28.448 234.137,29.972 233.629,30.48 227.748,30.48 227.659,30.391 227.627,30.391 227.462,30.226 ; 167.208,29.997 186.988,29.997 ; 167.208,29.997 186.988,29.997 ; 186.988,29.997 190.043,26.942 ; 190.043,26.942 190.043,29.464 191.037,30.458 203.721,30.458 205.232,28.947 ; 190.043,26.942 R4C20.2@191.324,25.661 190.043,26.942 ; 205.232,28.947 206.121,30.226 221.793,30.226 ; 221.793,30.226 227.462,30.226 ; 221.793,30.226 227.462,30.226
  Bottom Layer w0.254: v1(165.989,25.095) 167.243,26.349 167.243,29.045 167.64,29.442 171.797,29.442 175.578,25.661 R4C18.2@176.124,25.661
NetR4C2_3: R4C2.3 R4C4.3 R4C6.3 R4C8.3 R4C10.3 R4C12.3 R4C14.3 R4C16.3 R4C18.3 R4C20.3 R4C22.3 R4C24.3 R4C26.3 R45.1 R46.2 | length 366.8
  Top Layer w0.254: R45.1@29.972,42.711 R46.2@29.972,38.315 v1(32.094,38.315)
  MidLayer1 w0.254: v1(32.094,38.315) 41.173,29.235 43.205,29.235 43.434,29.464 50.698,29.464 51.918,28.245 51.918,27.432 53.137,26.213 53.137,24.548 R4C2.3@54.524,23.161 ; R4C8.3@100.124,23.161 100.124,19.459 v1(101.092,18.491) ; R4C12.3@130.524,23.161 131.724,21.961 v1(131.724,20.726) ; R4C14.3@145.724,23.161 150.826,18.059 155.822,18.059 R4C16.3@160.924,23.161 v1(160.924,18.618) ; R4C20.3@191.324,23.161 190.025,24.46 188.341,24.46 187.757,23.876 187.757,22.352 190.068,20.041 v1(197.968,20.041) ; R4C26.3@236.924,23.161 236.924,19.641 v1(237.084,19.482)
  MidLayer2 w0.254: R4C6.3@84.924,23.161 89.594,18.491 v1(101.092,18.491) ; v1(131.724,20.726) 132.867,19.583 142.146,19.583 R4C14.3@145.724,23.161 ; R4C22.3@206.524,23.161 207.816,21.869 209.804,21.869 211.179,23.245 211.179,28.277 212.612,29.71 218.172,29.71 218.413,29.469 218.413,26.472 R4C24.3@221.724,23.161
  Bottom Layer w0.254: R4C2.3@54.524,23.161 56.313,21.372 67.935,21.372 R4C4.3@69.724,23.161 74.572,18.313 101.092,18.313 103.934,18.313 ; v1(101.092,18.491) 103.756,18.491 103.934,18.313 ; v1(131.724,20.726) 129.184,20.726 128.814,20.356 118.129,20.356 R4C10.3@115.324,23.161 111.477,19.314 111.477,19.047 110.744,18.313 ; v1(160.924,18.618) 168.656,18.618 ; R4C18.3@176.124,23.161 171.581,18.618 ; v1(197.968,20.041) 199.695,18.313 216.876,18.313 ; v1(237.084,19.482) 236.989,19.387 225.498,19.387 R4C24.3@221.724,23.161 ; 103.934,18.313 110.744,18.313 ; 103.934,18.313 110.744,18.313 ; 168.656,18.618 167.513,17.475 167.513,16.967 168.148,16.332 214.895,16.332 216.876,18.313 ; 168.656,18.618 171.581,18.618 ; 168.656,18.618 171.581,18.618 ; 216.876,18.313 R4C24.3@221.724,23.161 ; 216.876,18.313 R4C24.3@221.724,23.161
NetR4C2_4: R4C2.4 R4C4.4 R4C6.4 R4C8.4 R4C10.4 R4C12.4 R4C14.4 R4C16.4 R4C18.4 R4C20.4 R4C22.4 R4C24.4 R4C26.4 R46.1 R47.2 | length 310.8
  Top Layer w0.254: R46.1@29.972,36.615 R47.2@29.972,32.219 33.415,32.219 v1(41.554,24.079)
  MidLayer2 w0.254: v1(54.508,19.787) 56.548,19.787 60.604,23.843 60.604,27.501 59.944,28.161 R4C2.4@57.024,28.161 ; v1(67.364,27.991) 69.221,29.848 70.537,29.848 R4C4.4@72.224,28.161 73.529,28.161 75.848,30.48 81.677,30.48 82.563,29.594 85.991,29.594 R4C6.4@87.424,28.161 ; R4C12.4@133.024,28.161 135.585,25.6 135.585,22.352 136.601,21.336 140.894,21.336 141.91,22.352 141.91,26.158 145.193,29.442 146.943,29.442 R4C14.4@148.224,28.161
  Bottom Layer w0.254: v1(41.554,24.079) 45.847,19.787 v1(54.508,19.787) ; R4C2.4@57.024,28.161 58.305,29.442 65.913,29.442 v1(67.364,27.991) ; R4C6.4@87.424,28.161 89.967,25.618 89.967,23.317 91.44,21.844 98.082,21.844 98.59,22.352 98.59,28.577 99.477,29.464 101.321,29.464 R4C8.4@102.624,28.161 104.445,26.34 104.445,19.279 104.902,18.821 110.49,18.821 110.947,19.279 110.947,21.412 113.919,24.384 113.919,28.956 114.427,29.464 116.521,29.464 R4C10.4@117.824,28.161 120.396,25.589 120.396,22.619 121.643,21.372 124.308,21.372 124.713,21.777 126.577,21.777 126.797,21.996 126.797,26.892 129.369,29.464 131.721,29.464 R4C12.4@133.024,28.161 ; R4C14.4@148.224,28.161 150.013,29.95 150.519,29.95 151.027,30.458 156.957,30.458 157.694,29.721 161.864,29.721 R4C16.4@163.424,28.161 165.464,30.201 166.227,30.201 166.484,30.458 172.813,30.458 173.423,29.848 176.937,29.848 R4C18.4@178.624,28.161 180.921,30.458 191.527,30.458 R4C20.4@193.824,28.161 195.613,29.95 207.235,29.95 R4C22.4@209.024,28.161 210.82,26.365 210.82,19.837 211.328,19.329 215.898,19.329 218.413,21.844 218.413,27.457 220.445,29.489 222.896,29.489 R4C24.4@224.224,28.161 226.013,29.95 233.613,29.95 234.099,29.464 238.121,29.464 R4C26.4@239.424,28.161
NetR4C2_5: R4C2.5 R4C4.5 R4C6.5 R4C8.5 R4C10.5 R4C12.5 R4C14.5 R4C16.5 R4C18.5 R4C20.5 R4C22.5 R4C24.5 R4C26.5 R47.1 R48.2 | length 488.9
  Top Layer w0.254: R47.1@29.972,30.519 R48.2@29.972,26.123 29.464,26.123 29.083,25.742 29.083,18.923 v1(34.29,13.716)
  MidLayer1 w0.254: v1(34.29,13.716) 38.024,17.45 72.136,17.45 73.508,18.821 73.508,24.377 R4C4.5@72.224,25.661 73.508,26.945 73.508,28.854 72.92,29.442 68.66,29.442 68.402,29.185 68.402,20.269 67.158,19.025 63.66,19.025 R4C2.5@57.024,25.661 ; v1(127.991,22.682) 127.991,27.893 129.54,29.442 133.829,29.442 134.315,28.956 134.315,26.952 R4C12.5@133.024,25.661 ; R4C16.5@163.424,25.661 167.205,21.88 171.704,21.88 174.843,25.019 174.843,29.025 175.26,29.442 179.324,29.442 179.908,28.858 179.908,26.945 R4C18.5@178.624,25.661
  MidLayer2 w0.254: v1(99.441,13.716) 103.124,17.399 102.794,19.507 93.578,19.507 92.221,20.864 ; R4C8.5@102.624,25.661 103.911,24.374 103.911,22.2 102.616,20.904 92.181,20.904 ; v1(127.991,22.682) 126.68,21.372 121.412,21.372 ; R4C14.5@148.224,25.661 149.53,24.355 ; R4C16.5@163.424,25.661 164.719,24.366 164.719,22.352 163.728,21.361 151.892,21.361 149.53,23.527 ; R4C18.5@178.624,25.661 v1(181.407,22.878) ; v1(219.481,22.403) 220.004,21.88 225.044,21.88 225.527,22.363 225.527,24.358 R4C24.5@224.224,25.661 227.535,28.972 227.535,29.393 228.092,29.95 233.172,29.95 233.613,29.509 233.613,27.753 234.905,26.461 234.905,22.676 235.712,21.869 240.284,21.869 240.716,22.301 240.716,24.369 R4C26.5@239.424,25.661 ; R4C6.5@87.424,25.661 92.181,20.904 ; R4C6.5@87.424,25.661 92.181,20.904 ; R4C6.5@87.424,25.661 92.181,20.904 ; 92.181,20.904 92.221,20.864 ; 92.181,20.904 92.221,20.864 ; 92.221,20.864 117.816,20.864 119.164,22.212 119.164,24.321 ; 119.164,24.321 R4C10.5@117.824,25.661 119.164,24.321 ; 119.164,24.321 120.458,23.027 120.458,22.326 ; 120.458,22.326 121.412,21.372 ; 120.458,22.326 121.412,21.372 ; 121.412,21.372 124.318,18.466 147.828,18.466 149.53,20.168 149.53,23.527 ; 149.53,23.527 149.53,24.355 ; 149.53,23.527 149.53,24.355
  Bottom Layer w0.254: v1(34.29,13.716) v1(99.441,13.716) ; v1(181.407,22.878) 184.498,19.787 196.088,19.787 197.358,21.057 209.499,21.057 210.312,21.869 ; R4C20.5@193.824,25.661 197.605,29.442 202.184,29.442 202.705,28.921 202.705,24.917 205.742,21.88 209.804,21.88 210.312,22.388 ; R4C22.5@209.024,25.661 210.312,24.373 ; v1(219.481,22.403) 219.481,21.641 216.662,18.821 210.566,18.821 210.312,19.075 210.312,21.869 ; 210.312,21.869 210.312,22.388 ; 210.312,21.869 210.312,22.388 ; 210.312,22.388 210.312,24.373 ; 210.312,22.388 210.312,24.373 ; 210.312,22.388 210.312,24.373
NetR4C2_6: R4C2.6 R4C4.6 R4C6.6 R4C8.6 R4C10.6 R4C12.6 R4C14.6 R4C16.6 R4C18.6 R4C20.6 R4C22.6 R4C24.6 R4C26.6 R48.1 | length 285.6
  Top Layer w0.254: R48.1@29.972,24.423 v1(34.163,24.423)
  MidLayer1 w0.254: v1(34.163,24.423) 37.199,21.387 55.25,21.387 R4C2.6@57.024,23.161 62.151,18.034 67.097,18.034 R4C4.6@72.224,23.161 ; R4C8.6@102.624,23.161 104.445,21.34 116.003,21.34 R4C10.6@117.824,23.161 ; R4C16.6@163.424,23.161 165.213,21.372 176.835,21.372 R4C18.6@178.624,23.161 184.742,17.043 202.906,17.043 R4C22.6@209.024,23.161 209.024,21.627 212.591,18.059 219.122,18.059 R4C24.6@224.224,23.161
  MidLayer2 w0.254: v1(146.761,19.482) 148.224,20.945 R4C14.6@148.224,23.161
  Bottom Layer w0.254: R4C4.6@72.224,23.161 74.013,21.372 85.635,21.372 R4C6.6@87.424,23.161 89.681,20.904 100.367,20.904 R4C8.6@102.624,23.161 ; R4C10.6@117.824,23.161 120.121,20.864 127.798,20.864 128.676,21.742 131.605,21.742 R4C12.6@133.024,23.161 136.703,19.482 v1(146.761,19.482) ; R4C14.6@148.224,23.161 150.784,25.721 150.784,28.562 152.172,29.95 156.678,29.95 157.658,28.971 157.658,25.966 159.512,24.112 159.512,22.389 160.057,21.844 162.107,21.844 R4C16.6@163.424,23.161 ; R4C18.6@178.624,23.161 179.883,24.42 180.155,27.149 182.956,29.95 187.452,29.95 189.992,27.41 189.992,22.377 190.5,21.869 192.532,21.869 R4C20.6@193.824,23.161 ; R4C24.6@224.224,23.161 225.527,24.464 225.527,26.314 228.654,29.442 232.838,29.442 235.636,26.645 235.636,22.464 236.22,21.88 238.143,21.88 R4C26.6@239.424,23.161